# Altium PCB STM32103C8T6_NEW.PcbDoc
Units mil, origin at the board's own origin, x right, y up, seen from the top; angles counter-clockwise.
Board outline 1640 x 1920 mil, 2 copper layers (Top Layer, Bottom Layer); 44 components, 51 nets, 202 pads, 39 vias.
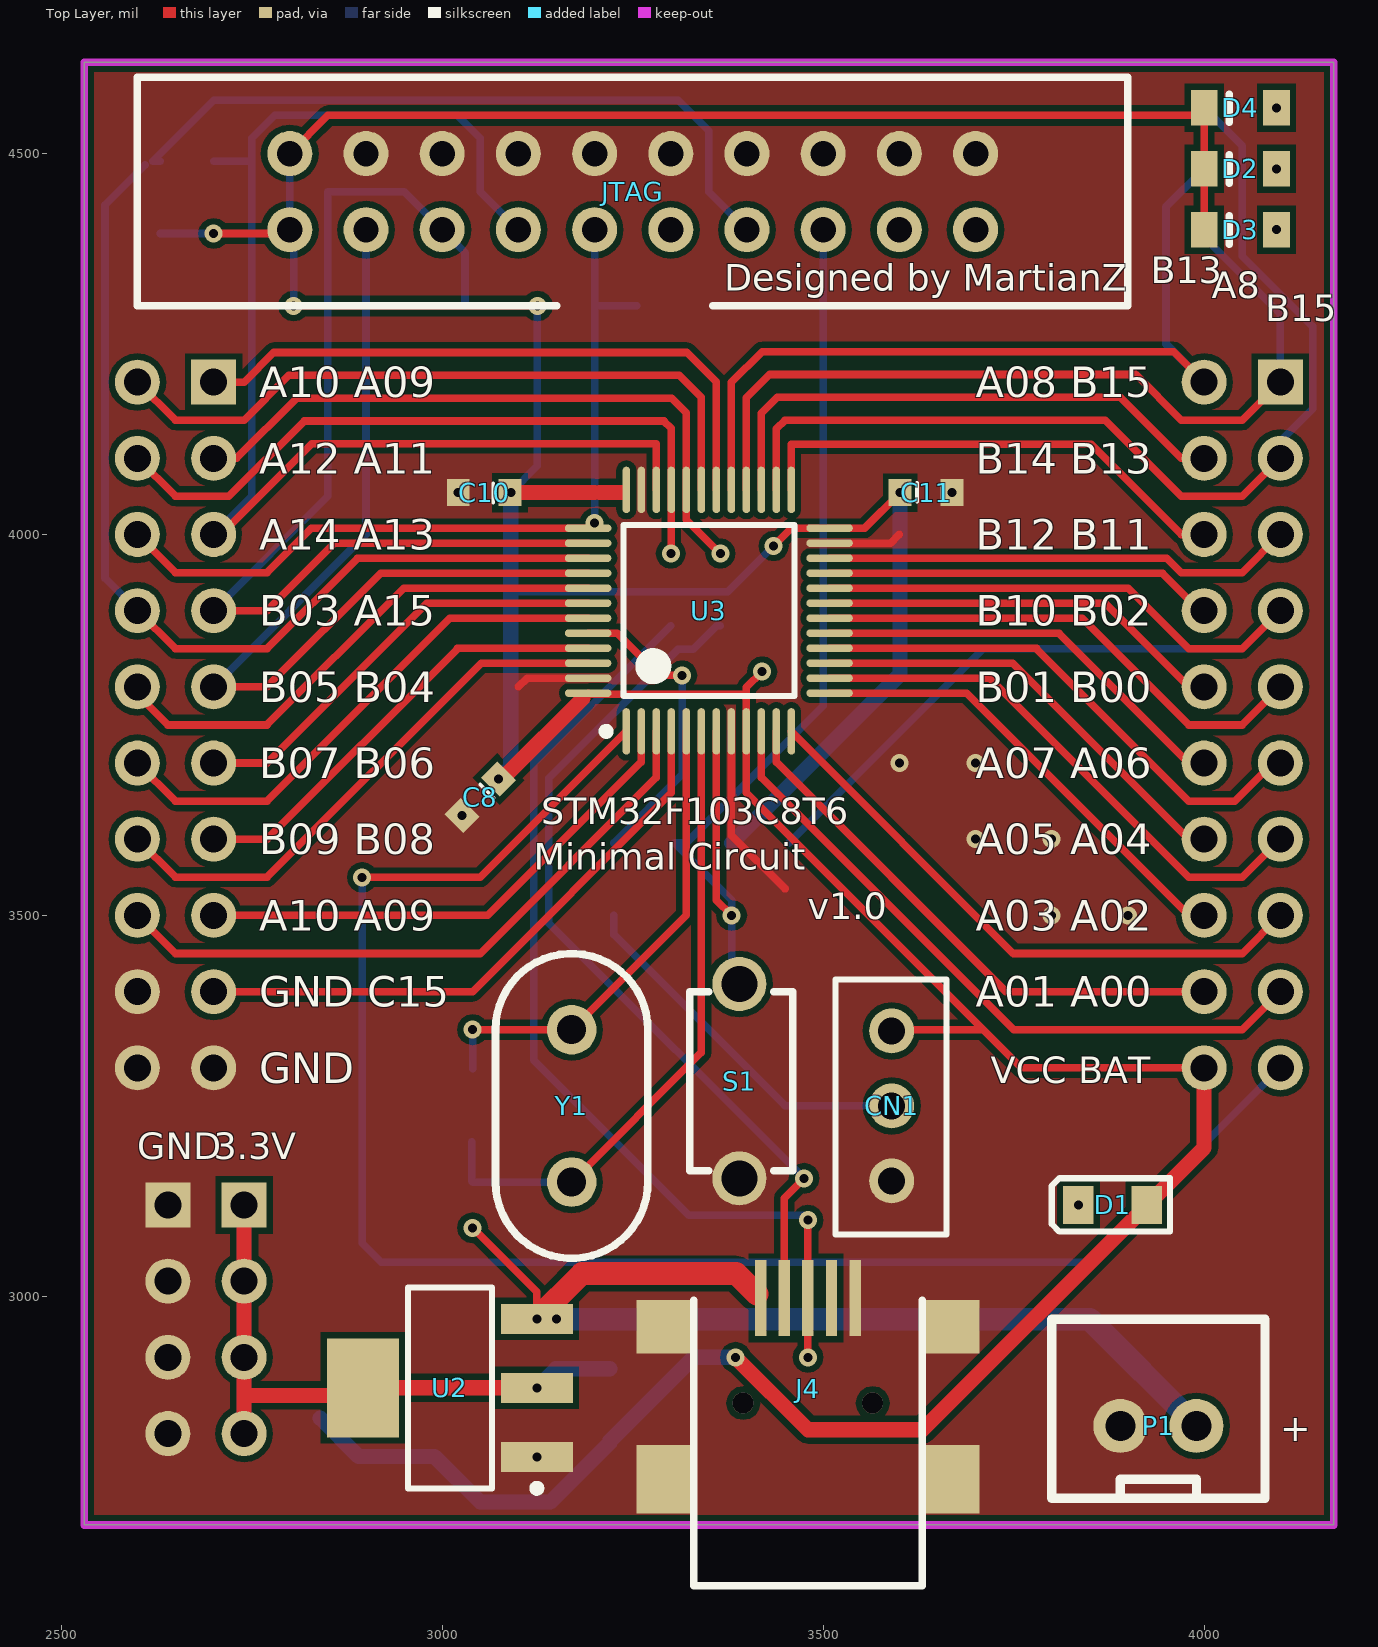
[diagram p0: Top Layer view]
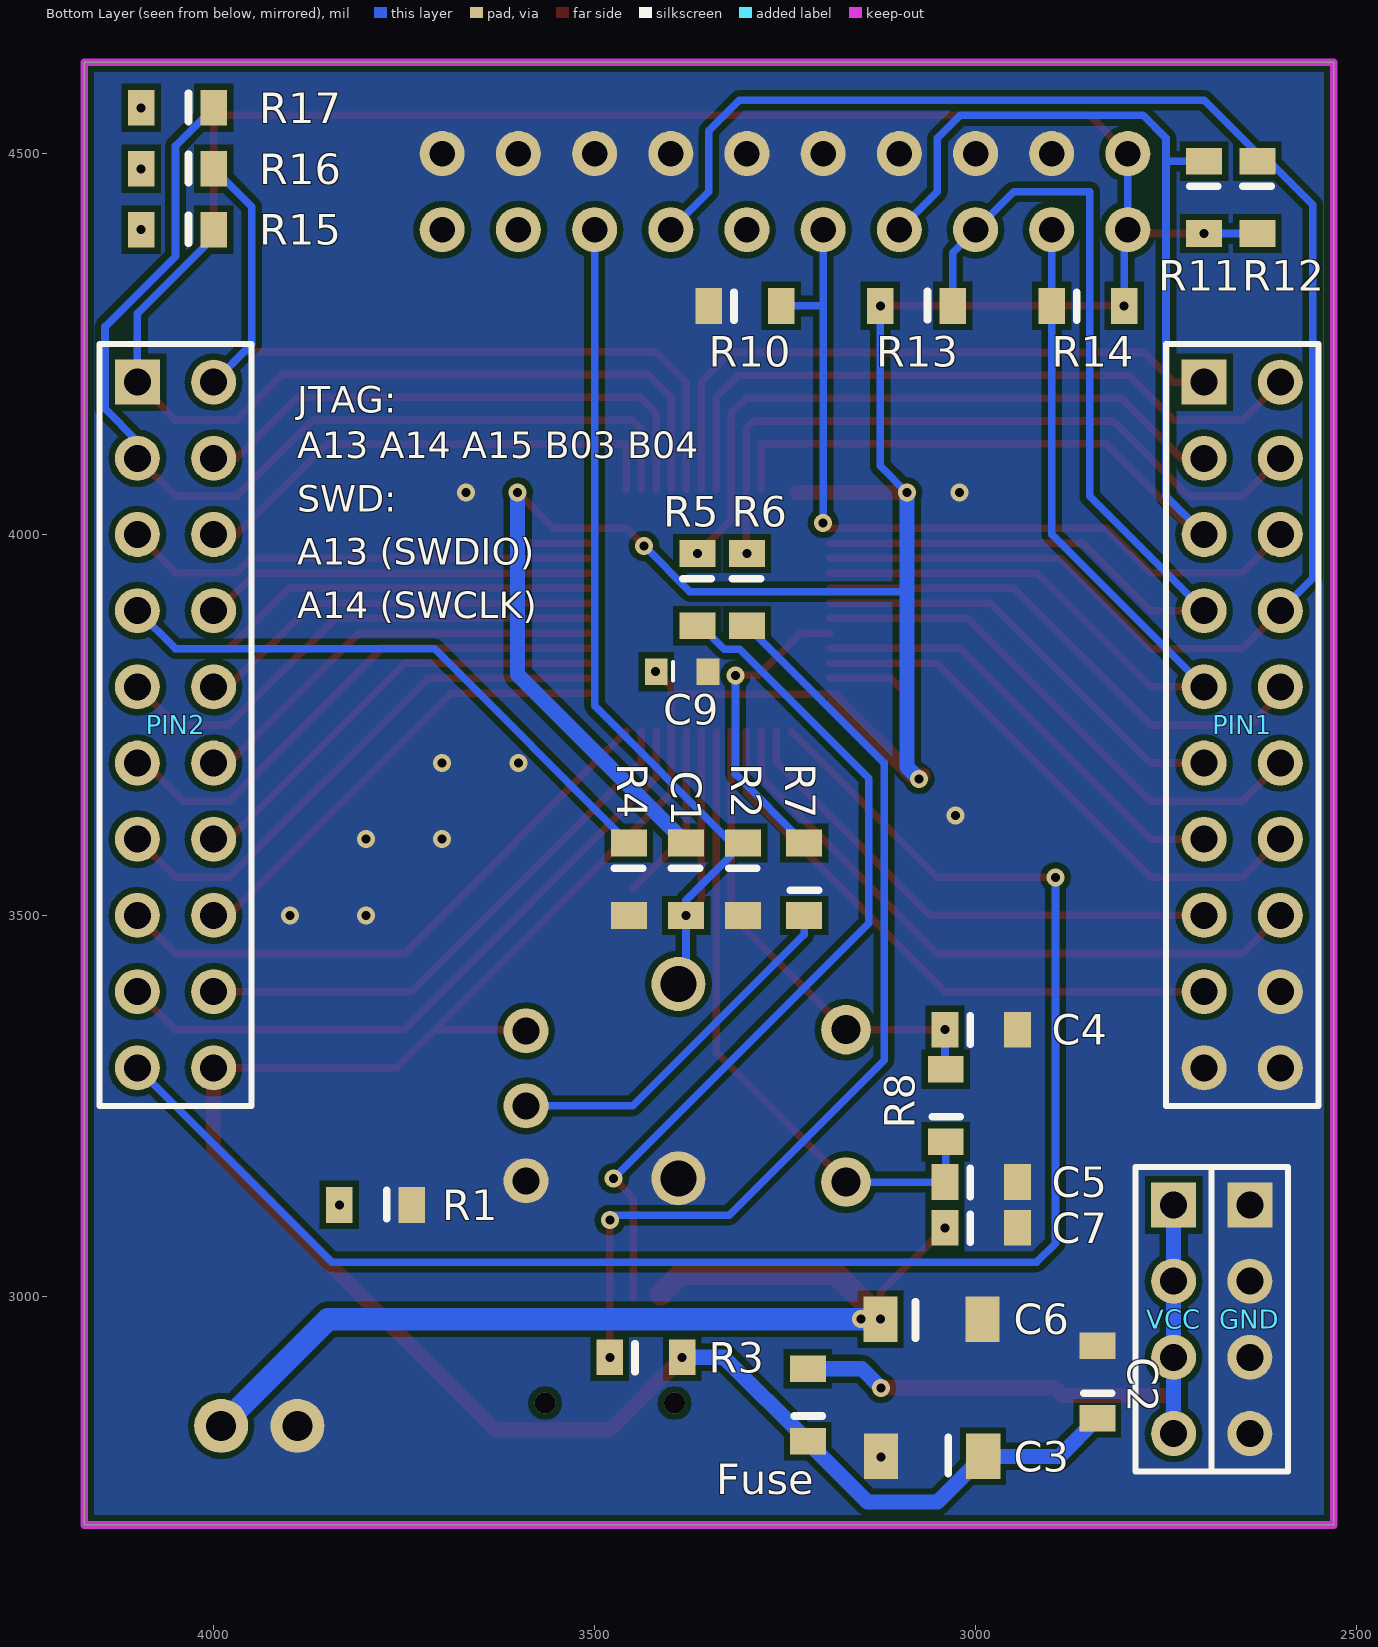
[diagram p1: Bottom Layer view, seen from below]

## Layer stack, top to bottom
Top Layer: signal copper 1.4
Dielectric: dielectric 12.6, FR-4, Dk 4.8
Bottom Layer: signal copper 1.4

## Board outline
2530,4620 4170,4620 4170,2700 2530,2700

## Design rules (kind name [scope] priority, off if disabled: settings)
Clearance [All] p1: gap=8
ComponentClearance [All] p1 off: gap=10 collisioncheckmode=3 verticalgap=10 showdistances=FALSE
DiffPairsRouting [All] p1: maxlimit=500 minlimit=10 mostfreqgap=10 maxuncoupledlength=500
FabricationTestPointUsage TestPointUsage [All] p1: valid=0 allowmultiple=FALSE
FabricationTestpoint Testpoint [All] p1: side=3 testpointundercomponent=TRUE minsize=40 maxsize=100 preferedsize=60 minholesize=0 maxholesize=40 preferedholesize=32 testpointgrid=1 allowsidetop=TRUE allowsidebottom=TRUE usegrid=TRUE gridtolerance=0.01
HoleSize [All] p1: absolutevalues=TRUE maxlimit=10000 minlimit=1 maxpercent=80.000 minpercent=20.000
MinimumSolderMaskSliver [All] p1 off: minsoldermaskwidth=10
NetAntennae [All] p1 off: netantennaetolerance=0
PlaneConnect [All] p1: planeconnectstyle=Direct reliefexpansion=20 reliefentries=4 reliefconductorwidth=15 reliefairgap=10
PolygonConnect [All] p1: connectstyle=Direct reliefconductorwidth=15 reliefentries=4 polygonreliefangle="90 Angle" airgapwidth=10
RoutingVias [All] p1: holewidth=15 width=25 viastyle="Through Hole" minholewidth=10 minwidth=20 maxholewidth=4000 maxwidth=5000
SilkToSilkClearance [All] p1 off: silktosilkclearance=10
SilkscreenOverComponentPads [All] p1 off: minsilkscreentomaskgap=10
SolderMaskExpansion [All] p1: expansion=4
Width [All] p1: maxlimit=200 minlimit=8 preferedwidth=10 minimp=50.000000 maximp=50.000000 favimp=50.000000
18 further rules are at their usual default settings.

## Components (designator, comment, footprint, x,y, rotation, side; value= is the part's Value field where it differs from the comment)
C1 "Cap Semi" 0805 3305,3595 r270 bottom
C2 "Cap Semi" 0805 2840,2840 r90 bottom
C3 "Cap Pol1" 1206 2990,2790 r0 bottom
C4 "22P" 0805 3040,3350 r180 bottom
C5 "22P" 0805 3040,3150 r180 bottom
C6 "Cap Pol1" 1206 3124.73,2970 r180 bottom
C7 "Cap Semi" 0805 3040,3090 r180 bottom
C8 "Cap Semi" 0603 3050,3655 r225 top
C9 "Cap Semi" 0603 3385,3820 r180 bottom
C10 "Cap Semi" 0603 3055,4055 r180 top
C11 "Cap Semi" 0603 3635,4055 r0 top
CN1 "BOOT" KEY_22D00 3590,3250 r90 top
D1 "GREEN_LED" LED_0805 3925,3120 r180 top
D2 "LED0" 0805 4000,4480 r0 top
D3 "LED0" 0805 4000,4400 r0 top
D4 "LED0" 0805 4000,4560 r0 top
Fuse "Fuse 1" 0805 3220,2810 r90 bottom
GND "Header 4" HDR1X4 2640,3120 r270 bottom
J4 "MINI-USB" MINI_USB 3480,2860 r180 top
JTAG "JTAG(20-PIN)" JP20_DOMNLOAD 2800,4400 r90 top
P1 "POWER" XH2.54-2 3890,2830 r0 top
PIN1 "Header 10X2" HDR2X10 2700,4200 r270 bottom
PIN2 "Header 10X2" HDR2X10 4100,4200 r270 bottom
R1 "Res Semi" 0805 3740,3120 r0 bottom
R2 "Res2" 0805 3380,3595 r270 bottom
R3 "Res Semi" 0805 3480,2920 r180 bottom
R4 "Res Semi" 0805 3455,3595 r270 bottom
R5 "Res Semi" 0805 3365,3975 r270 bottom
R6 "Res Semi" 0805 3300,3975 r270 bottom
R7 "Res Semi" 0805 3225,3500 r90 bottom
R8 "1M" 0805 3039,3203 r90 bottom
R10 "10K" 0805 3350,4300 r180 bottom
R11 "10K" 0805 2700,4490 r270 bottom
R12 "10K" 0805 2630,4490 r270 bottom
R13 "10K" 0805 3030,4300 r0 bottom
R14 "10K" 0805 2900,4300 r180 bottom
R15 "1K" 0805 4000,4480 r0 bottom
R16 "1K" 0805 4000,4400 r0 bottom
R17 "1K" 0805 4000,4560 r0 bottom
S1 "SW-PB" 棕色小按键开关 3390,3410 r270 top
U2 "LM1117IMPX-3.3" MP04A_N 3010,2880 r180 top
U3 "STM32F103C8T6" LQFP48_L 3350,3900 r90 top
VCC "Header 4" HDR1X4 2740,3120 r270 bottom
Y1 "8M" XTAL 3170,3250 r90 top

## Footprints (in the part's own frame and the unit in brackets; to place one, negate y for a bottom-side part, rotate by r counter-clockwise, add the part's x,y. Pads: shape width x height; smd on the part's side, far side on the other; paste and mask are expansions set on the pad)
0603 [mil]
  rect 30x35 smd: 1(-34,0) 2(34,0)
  silkscreen extent -12,-12 -12,13
0805 [mil]
  rect 35x47 smd: 1(0,0) 2(95,0)
  silkscreen extent 33,-19 33,18
1206 [mil]
  rect 45x60 smd: 1(0,0) 2(134,0)
  silkscreen extent 46,-25 46,23
HDR1X4 [mm] "Connector; Header; 4 Position"
  rect 1.5x1.5 hole 0.9: 1(0,0)
  round 1.5 hole 0.9: 2(2.54,0) 3(5.08,0) 4(7.62,0)
  silkscreen extent -1.27,-1.27 8.89,1.27
HDR2X10 [mm] "Connector; Header; 10x2 Position"
  rect 1.5x1.5 hole 0.9: 1(0,0)
  round 1.5 hole 0.9: 2(0,2.54) 3(2.54,0) 4(2.54,2.54) 5(5.08,0) 6(5.08,2.54) 7(7.62,0) 8(7.62,2.54) 9(10.16,0) 10(10.16,2.54) 11(12.7,0) 12(12.7,2.54) 13(15.24,0) 14(15.24,2.54) 15(17.78,0) 16(17.78,2.54) 17(20.32,0) 18(20.32,2.54) 19(22.86,0) 20(22.86,2.54)
  silkscreen extent -1.27,-1.27 24.13,3.81
JP20_DOMNLOAD [mm]
  round 1.5 hole 0.85: 1(0,0) 2(2.54,0) 3(0,-2.54) 4(2.54,-2.54) 5(0,-5.08) 6(2.54,-5.08) 7(0,-7.62) 8(2.54,-7.62) 9(0,-10.16) 10(2.54,-10.16) 11(0,-12.7) 12(2.54,-12.7) 13(0,-15.24) 14(2.54,-15.24) 15(0,-17.78) 16(2.54,-17.78) 17(0,-20.32) 18(2.54,-20.32) 19(0,-22.86) 20(2.54,-22.86)
  silkscreen extent -2.54,-27.94 5.08,5.08
KEY_22D00 [mm]
  round 1.5 hole 0.9: 1(-2.5,0) 2(0,0) 3(2.5,0)
  silkscreen extent -4.28,-1.82 4.22,1.88
LED_0805 [mil]
  rect 40x50 smd: 1(0,0) 2(90,0)
  silkscreen extent -30,-35 125,35
LQFP48_L [mm]
  oval 1.55x0.25 smd: 1(-4.025,2.75) 2(-4.025,2.25) 3(-4.025,1.75) 4(-4.025,1.25) 5(-4.025,0.75) 6(-4.025,0.25) 7(-4.025,-0.25) 8(-4.025,-0.75) 9(-4.025,-1.25) 10(-4.025,-1.75) 11(-4.025,-2.25) 12(-4.025,-2.75) 25(4.025,-2.75) 26(4.025,-2.25) 27(4.025,-1.75) 28(4.025,-1.25) 29(4.025,-0.75) 30(4.025,-0.25) 31(4.025,0.25) 32(4.025,0.75) 33(4.025,1.25) 34(4.025,1.75) 35(4.025,2.25) 36(4.025,2.75)
  oval 0.25x1.55 smd: 13(-2.75,-4.025) 14(-2.25,-4.025) 15(-1.75,-4.025) 16(-1.25,-4.025) 17(-0.75,-4.025) 18(-0.25,-4.025) 19(0.25,-4.025) 20(0.75,-4.025) 21(1.25,-4.025) 22(1.75,-4.025) 23(2.25,-4.025) 24(2.75,-4.025) 37(2.75,4.025) 38(2.25,4.025) 39(1.75,4.025) 40(1.25,4.025) 41(0.75,4.025) 42(0.25,4.025) 43(-0.25,4.025) 44(-0.75,4.025) 45(-1.25,4.025) 46(-1.75,4.025) 47(-2.25,4.025) 48(-2.75,4.025)
  silkscreen extent -4.15,-2.85 2.85,3.55
MINI_USB [mil]
  rect 15x100 smd: 1(62,-138) 2(31,-138) 3(0,-138) 4(-31,-138) 5(-62,-138)
  rect 70x70 smd: 6(-190,-100) 6(190,-100)
  rect 70x90 smd: 6(-190,100) 6(190,100)
  silkscreen extent -150,-135 150,240
MP04A_N [mm] "SOT223, 4-Leads, Body 6.5x3.5mm, Pitch 2.3mm, Lead Span 7mm, IPC Medium Density"
  rect 2.4x1 smd: 1(-2.9,2.3) 2(-2.9,0) 3(-2.9,-2.3)
  rect 2.4x3.3 smd: 4(2.9,0)
  silkscreen extent -3.03,-3.35 1.4,3.47, body extent -1.85,-3.35 1.85,3.35, height 1.8
XH2.54-2 [mm]
  round 1.8 hole 1: 1(0,0) 2(2.54,0)
  silkscreen extent -2.29,-2.41 4.83,3.56
XTAL [mil]
  round 65 hole 38: 1(-100,0) 2(100,0)
  silkscreen extent -200,-100 200,100
棕色小按键开关 [mm]
  round 1.8 hole 1.2: 1(0,0) 2(6.477,0)
  silkscreen extent 0.25,-1.65 6.22,1.78

## Part data
C1 C2 C7 C8 C9 C10 C11: "Capacitor (Semiconductor SIM Model)"
C3 C6: "Polarized Capacitor (Radial)"
C4 C5: library part Cap, "Capacitor"
CN1: library part CON3
D1: library part LED3, "Typical BLUE SiC LED"
D2 D3 D4: "Typical INFRARED GaAs LED"
Fuse: "Fuse"
GND VCC: "Header, 4-Pin"
J4: library part USB-MINI
P1: library part "Header 2", "Header, 2-Pin"
PIN1 PIN2: "Header, 10-Pin, Dual row"
R1 R3 R4 R5 R6 R7: "Semiconductor Resistor"
R2: "Resistor"
R8 R10 R11 R12 R13 R14 R15 R16 R17: library part Res2, "Resistor"
U2: "800mA Low-Dropout Linear Regulator, 4-pin SOT-223"
U3: "STM32 ARM-based 32-bit MCU with 64 Kbytes Flash, 48-pin LQFP, Industrial Temperature"
Y1: library part XTAL, "Crystal Oscillator"

## Via types
v1: diameter 23.62, hole 11.81, Top Layer to Bottom Layer, tented both sides, 30 vias
v2: diameter 23.62, hole 11.81, Top Layer to Bottom Layer, tented top, 4 vias
v3: diameter 23.62, hole 11.81, Top Layer to Bottom Layer, tented bottom, 3 vias
v4: diameter 27.56, hole 27.56, Top Layer to Bottom Layer, 2 vias

## Nets (pads, with @x,y where several pads share a name; then routed paths per layer and width w, separated by ;. In a path a pad name is that pad's centre, name@x,y a point inside that pad or via, vN(x,y) a via of type N, cw(c..) or ccw(c..) an arc to the next point about the centre after c; other vN are vias at no path point)
BOOT0: CN1.2 R7.1 | length 463.2
  Bottom Layer w10: R7.1 3225,3475 3450,3250 CN1.2@3570,3250
GND: C1.2 C2.2 C3.2 C4.2 C5.2 C6.2 C7.2 C8.2 C9.2 C10.2 C11.2 CN1.1 GND.1 GND.2 GND.3 GND.4 J4.5 J4.6 JTAG.4 JTAG.6 JTAG.8 JTAG.10 JTAG.12 JTAG.14 JTAG.16 JTAG.18 JTAG.20 P1.1 PIN1.18 PIN1.19 PIN1.20 R1.1 R4.2 R10.1 S1.2 U2.1 U3.8 U3.23 U3.35 U3.47 | length 428.3
  Top Layer w10: 3100,3800 3111.42,3811.42 U3.47 ; U3.8 3379.53,3605.47 3450,3535 ; U3.23 3588.58,3988.58 3600,4000
  other v1: 3124.17,2789.45 3800,3500 3900,3500 3700,3600 3800,3600 3025.96,3630.96 3600,3700 3700,3700 3021,4055 3669,4055
JNTRST: JTAG.3 PIN1.9 R14.1 U3.40 | length 1236.2
  Top Layer w10: PIN1.9 2770,3800 2919.21,3949.21 U3.40
  Bottom Layer w10: PIN1.9 2900,4000 JTAG.3
JTCK: JTAG.9 PIN1.6 R10.2 U3.37 | length 1088.4
  Top Layer w10: PIN1.6 2650,3950 2770,3950 2828.27,4008.27 U3.37 v1@3198.27,4015 ; v1(3200,4015) v1@3198.27,4015 ; v1@3200,4016.73 v1@3198.27,4015
  Bottom Layer w10: v1@3200,4016.73 3200,4300 ; JTAG.9 3200,4300 ; R10.2 3200,4300
JTDI: JTAG.5 PIN1.7 R13.1 U3.38 | length 1423.5
  Top Layer w10: PIN1.7 2770,3900 2858.58,3988.58 U3.38
  Bottom Layer w10: PIN1.7 2850,4050 2850,4450 2950,4450 JTAG.5 3030,4370 R13.1
JTDO: JTAG.13 PIN1.8 R12.1 U3.39 | length 2226.3
  Top Layer w10: PIN1.8 2650,3850 2770,3850 2888.9,3968.9 U3.39
  Bottom Layer w10: PIN1.8 2557.47,3942.53 2557.47,4432.47 R12.1@2610,4485 ; R12.1 2620,4490 2700,4570 3310,4570 3350,4530 3350,4450 JTAG.13
JTMS: JTAG.7 PIN1.5 R11.1 U3.34 | length 1747.1
  Top Layer w10: PIN1.5 2710,4000 2828.9,4118.9 3281.1,4118.9 U3.34
  Bottom Layer w10: PIN1.5 2750,4050 2750,4490 ; R11.1 2750,4490 ; JTAG.7 3050,4450 3050,4520 3020,4550 2780,4550 2750,4520 2750,4490
NetD1_2: D1.2 R1.2
  other v1: 3835,3120
NetD2_2: D2.2 R15.2
  other v1: 4095,4480
NetD3_2: D3.2 R16.2
  other v1: 4095,4400
NetD4_2: D4.2 R17.2
  other v1: 4095,4560
NetFuse_2: Fuse.2 U2.2 U2.4 VCC.1 VCC.2 VCC.3 VCC.4 | length 1094.5
  Top Layer w20: VCC.4 2740,2870 ; VCC.1 VCC.2 VCC.3 2740,2870 ; v1(3124.17,2880) U2.4 2885.83,2870 2740,2870
  Bottom Layer w20: VCC.4 VCC.3 VCC.2 VCC.1 ; v1(3124.17,2880) 3149.17,2905 Fuse.2
NetJ4_2: J4.2 R5.2 | length 1139.4
  Top Layer w10: J4.2 3449,3129 v1(3475,3155)
  Bottom Layer w10: R5.2 3360.12,3880 3329.62,3849.5 3309.5,3849.5 3140,3680 3140,3490 v1(3475,3155)
NetJ4_3: J4.3 R3.1 R6.2 | length 1271.5
  Top Layer w10: v1(3480,2920) J4.3 v1(3480,3100)
  Bottom Layer w10: R6.2 3120,3700 3120,3310 3323.43,3106.57 3473.43,3106.57 v1(3480,3100)
NetR7_2: R7.2 U3.44 | length 403.7
  Top Layer w10: U3.44 3229.53,3870.47 3285,3815 v1(3315,3815)
  Bottom Layer w10: R7.2 3315,3685 v1(3315,3815)
NRST: C1.1 JTAG.15 R2.2 S1.1 U3.7 | length 1364.7
  Top Layer w10: U3.7 3359.84,3520.16 v1(3380,3500)
  Bottom Layer w10: S1.1 3380,3420 v1(3380,3500) 3380,3520 C1.1 3320,3595 3500,3775 JTAG.15
OSCIN: C4.1 R8.2 U3.5 Y1.2 | length 634.9
  Top Layer w10: v1(3040,3350) Y1.2 3320.47,3500.47 U3.5
  Bottom Layer w10: R8.2@3040,3299 v1(3040,3350)
OSCOUT: C5.1 R8.1 U3.6 Y1.1 | length 844.1
  Top Layer w10: Y1.1 3340.16,3320.16 3340.16,3634.75 3340.11,3634.8 3340.11,3741.49 U3.6
  Bottom Layer w10: C5.1@3039,3151 R8.1 ; C5.1 Y1.1
PA0: PIN2.17 U3.10 | length 899.4
  Top Layer w10: U3.10 3418.9,3681.1 3750,3350 4050,3350 PIN2.17
PA1: PIN2.18 U3.11 | length 726.4
  Top Layer w10: U3.11 3438.58,3701.42 3740,3400 PIN2.18
PA2: PIN2.15 U3.12 | length 783.2
  Top Layer w10: U3.12 3749.8,3450 4050,3450 PIN2.15
PA3: PIN2.16 U3.13 | length 592.4
  Top Layer w10: U3.13 3688.27,3791.73 PIN2.16@3980,3500
PA4: PIN2.13 U3.14 | length 720.5
  Top Layer w10: U3.14 3718.58,3811.42 3980,3550 4050,3550 PIN2.13
PA5: PIN2.14 U3.15 | length 587.3
  Top Layer w10: U3.15 3748.9,3831.1 3980,3600 PIN2.14
PA6: PIN2.11 U3.16 | length 696.2
  Top Layer w10: U3.16 3780,3850.79 ; 3779.21,3850.79 3980,3650 4040,3650 4090,3700 PIN2.11
PA7: PIN2.12 U3.17 | length 562.1
  Top Layer w10: U3.17 3809.53,3870.47 3980,3700 PIN2.12
PA8: PIN2.2 R15.1 U3.29 | length 1116.3
  Top Layer w10: U3.29 3379.53,4199.53 3420,4240 3960,4240 PIN2.2
  Bottom Layer w10: PIN2.2 3950,4250 3950,4430 R15.1
PA9: PIN1.1 U3.30 | length 833.7
  Top Layer w10: PIN1.1 2740,4200 2778.9,4238.9 3321.1,4238.9 3359.84,4200.16 U3.30
PA10: PIN1.2 U3.31 | length 918.7
  Top Layer w10: PIN1.2 2650,4150 2740,4150 2798.9,4208.9 3311.1,4208.9 3340.16,4179.84 U3.31
PA11: PIN1.3 R5.1 U3.32 | length 864.1
  Top Layer w10: PIN1.3 2730,4100 2808.9,4178.9 3301.1,4178.9 3320.47,4159.53 U3.32 3320.47,4019.53 v2(3365,3975)
PA12: PIN1.4 R6.1 U3.33 | length 931
  Top Layer w10: PIN1.4 2650,4050 2720,4050 2818.9,4148.9 3291.1,4148.9 3300.79,4139.21 U3.33 3300.79,3975.79 v2(3300,3975)
PB0: PIN2.9 U3.18 | length 670.3
  Top Layer w10: U3.18 3839.84,3890.16 3980,3750 4050,3750 PIN2.9
PB1: PIN2.10 U3.19 | length 537
  Top Layer w10: U3.19 3870.16,3909.84 3980,3800 PIN2.10
PB2: PIN2.7 R4.1 U3.20 | length 1416.5
  Top Layer w10: U3.20 3900.47,3929.53 3980,3850 4050,3850 PIN2.7
  Bottom Layer w10: R4.1 3710,3850 4050,3850 PIN2.7
PB5: PIN1.10 U3.41 | length 692.5
  Top Layer w10: PIN1.10 2600,3790 2640,3750 2770,3750 2949.53,3929.53 U3.41
PB6: PIN1.11 U3.42 | length 578.5
  Top Layer w10: PIN1.11 2770,3700 2979.84,3909.84 U3.42
PB7: PIN1.12 U3.43 | length 711.7
  Top Layer w10: PIN1.12 2650,3650 2770,3650 3010.16,3890.16 U3.43
PB8: PIN1.13 U3.45 | length 596.2
  Top Layer w10: PIN1.13 2770,3600 3020.79,3850.79 ; 3020,3850.79 U3.45
PB9: PIN1.14 U3.46 | length 728.7
  Top Layer w10: PIN1.14 2650,3550 2770,3550 3051.1,3831.1 U3.46
PB10: PIN2.8 U3.21 | length 511.9
  Top Layer w10: U3.21 3945.33,3949.21 3994.54,3900 PIN2.8
PB11: PIN2.5 U3.22 | length 620.1
  Top Layer w10: U3.22 3951.1,3968.9 3970,3950 4050,3950 PIN2.5
PB12: PIN2.6 U3.25 | length 650.5
  Top Layer w10: U3.25 3458.27,4118.27 3851.73,4118.27 3970,4000 PIN2.6
PB13: PIN2.3 R17.1 U3.26 | length 1345.1
  Top Layer w10: U3.26 3438.58,4138.58 3450,4150 3870,4150 3970,4050 4050,4050 PIN2.3
  Bottom Layer w10: R17.1 4050,4510 4050,4365.46 4142.53,4272.93 4142.53,4165.09 4100,4122.56 PIN2.3
PB14: PIN2.4 U3.27 | length 723.4
  Top Layer w10: U3.27 3418.9,4158.9 3440,4180 3890,4180 3970,4100 PIN2.4
PB15: PIN2.1 R16.1 U3.28 | length 1121.3
  Top Layer w10: U3.28 3399.21,4179.21 3430,4210 3910,4210 3970,4150 4050,4150 PIN2.1
  Bottom Layer w10: R16.1 4000,4390 4100,4290 PIN2.1
PC13: PIN1.15 U3.2 | length 685
  Top Layer w10: PIN1.15 3060,3500 3261.42,3701.42 U3.2
PC14: PIN1.16 U3.3 | length 858
  Top Layer w10: PIN1.16 2650,3450 3050,3450 3281.1,3681.1 U3.3
PC15: PIN1.17 U3.4 | length 789.6
  Top Layer w10: PIN1.17 3040,3400 3300.79,3660.79 U3.4
VBAT: PIN2.19 U3.1 | length 2227
  Top Layer w10: v1(2895,3550) 3050.2,3550 U3.1
  Bottom Layer w10: v1(2895,3550) 2895,3070 2920,3045 3845,3045 PIN2.19
VCC: C2.1 C3.1 C8.1 C9.1 C10.1 C11.1 CN1.3 D1.1 D2.1 D3.1 D4.1 Fuse.1 JTAG.1 JTAG.2 PIN2.20 R2.1 R3.2 R11.2 R12.2 R13.2 R14.2 U3.9 U3.24 U3.36 U3.48 | length 6993
  Top Layer w10: v2(2700,4395) 2795,4395 JTAG.1 ; JTAG.2 2850,4550 3990,4550 D4.1 D2.1 D3.1 ; v1(2805,4300) v1(3125,4300) ; U3.48 3193.08,3790.19 3394.03,3790.19 3399.21,3785 ; 3200,4055 3206.54,4055 ; v2(3420,3820) 3399.21,3799.21 3399.21,3785 ; v1(3435,3985) 3458.27,4008.27 U3.24 3554.27,4008.27 v3(3601,4055) ; CN1.3@3570,3350 3710,3350 ; PIN2.20 3760,3300 3710,3350 ; 3399.21,3785 U3.9 3399.21,3660.79 3710,3350
  Top Layer w20: C8.1@3069.04,3684.04 3083.85,3684.04 3184.9,3785.1 ; C10.1 v3(3090,4055) 3200,4055 ; 3206.54,4055 3235.03,4055 ; v1(3385,2920) 3480,2825 3630.46,2825 3925,3119.54 D1.1 4000,3195 PIN2.20
  Bottom Layer w10: R12.2 v2(2700,4395) ; JTAG.2 JTAG.1 2805,4395 v1(2805,4300) ; 3090,3925 3375,3925 v1(3435,3985) ; v3(3090,4055) 3125,4090 v1(3125,4300)
  Bottom Layer w20: C2.1 2890,2790 C3.1 3050,2730 3141.96,2730 3220,2808.04 Fuse.1 3330,2920 v1(3385,2920) ; v3(3074.04,3679.04) 3090,3695 3090,3925 v3(3090,4055) ; R2.1 3601,3816 v3(3601,4055)
VIN: C6.1 C7.1 J4.1 P1.2 U2.3 | length 1402.2
  Top Layer w10: v1(3040,3090) 3124.17,3005.83 U2.3
  Top Layer w30: U2.3 3183.62,3030 3386,3030 J4.1@3413,3003
  Bottom Layer w30: v1(3124.73,2970) v1(3150,2970) 3850,2970 P1.2
pads on no net: J4.4 JTAG.11 JTAG.17 JTAG.19
copper on no net:
  other v4: 3395,2860 3565,2860

## Polygon pours and split planes (outlines as drawn)
GND on Bottom Layer "Top Layer-No Net" (solid, remove dead copper, pour order 7): 2530,4620 4170,4620 4170,2705 2535,2705 2530,2700
GND on Top Layer "Top Layer-No Net" (solid, remove dead copper, pour order 9): 2530,4615 2535,4620 4170,4620 4170,2700 2530,2700

## Keep-outs
Keep-Out Layer:
  the board outline again, w10

## Silkscreen, mask and mechanical layers (free items; w line width, h text height)
Top Overlay:
  text "B13" at 3930,4330 h35
  text "Designed by MartianZ" at 3370,4320 h35
  text "A8" at 4010,4310 h35
  text "B15" at 4080,4280 h35
  text "A10 A09" at 2760,4180 h40
  text "A08 B15" at 3700,4180 h40
  text "A12 A11" at 2760,4080 h40
  text "B14 B13" at 3700,4080 h40
  text "A14 A13" at 2760,3980 h40
  text "B12 B11" at 3700,3980 h40
  text "B03 A15" at 2760,3880 h40
  text "B10 B02" at 3700,3880 h40
  text "B05 B04" at 2760,3780 h40
  text "B01 B00" at 3700,3780 h40
  text "B07 B06" at 2760,3680 h40
  text "A07 A06" at 3700,3680 h40
  text "STM32F103C8T6" at 3130,3620 h35
  text "B09 B08" at 2760,3580 h40
  text "A05 A04" at 3700,3580 h40
  text "Minimal Circuit" at 3120,3560 h35
  text "v1.0" at 3480,3495 h35
  text "A10 A09" at 2760,3480 h40
  text "A03 A02" at 3700,3480 h40
  text "GND C15" at 2760,3380 h40
  text "A01 A00" at 3700,3380 h40
  text "GND" at 2760,3280 h40
  text "VCC BAT" at 3720,3280 h35
  text "GND" at 2600,3180 h35
  text "3.3V" at 2700,3180 h35
  text "+" at 4100,2810 h35
Bottom Overlay:
  text "JTAG:" at 3890,4160 h35
  text "A13 A14 A15 B03 B04" at 3890,4100 h35
  text "SWD:" at 3890,4030 h35
  text "A13 (SWDIO)" at 3890,3960 h35
  text "A14 (SWCLK)" at 3890,3890 h35
Top Solder:
  text "ICKX" at 3305,3885 h35